# Altium PCB E1706R_Demo_1.PcbDoc
Units mil, origin at the board's own origin, x right, y up, seen from the top; angles counter-clockwise.
Board outline 1170 x 2260 mil, 2 copper layers (Top Layer, Bottom Layer); 11 components, 39 nets, 82 pads, 9 vias.
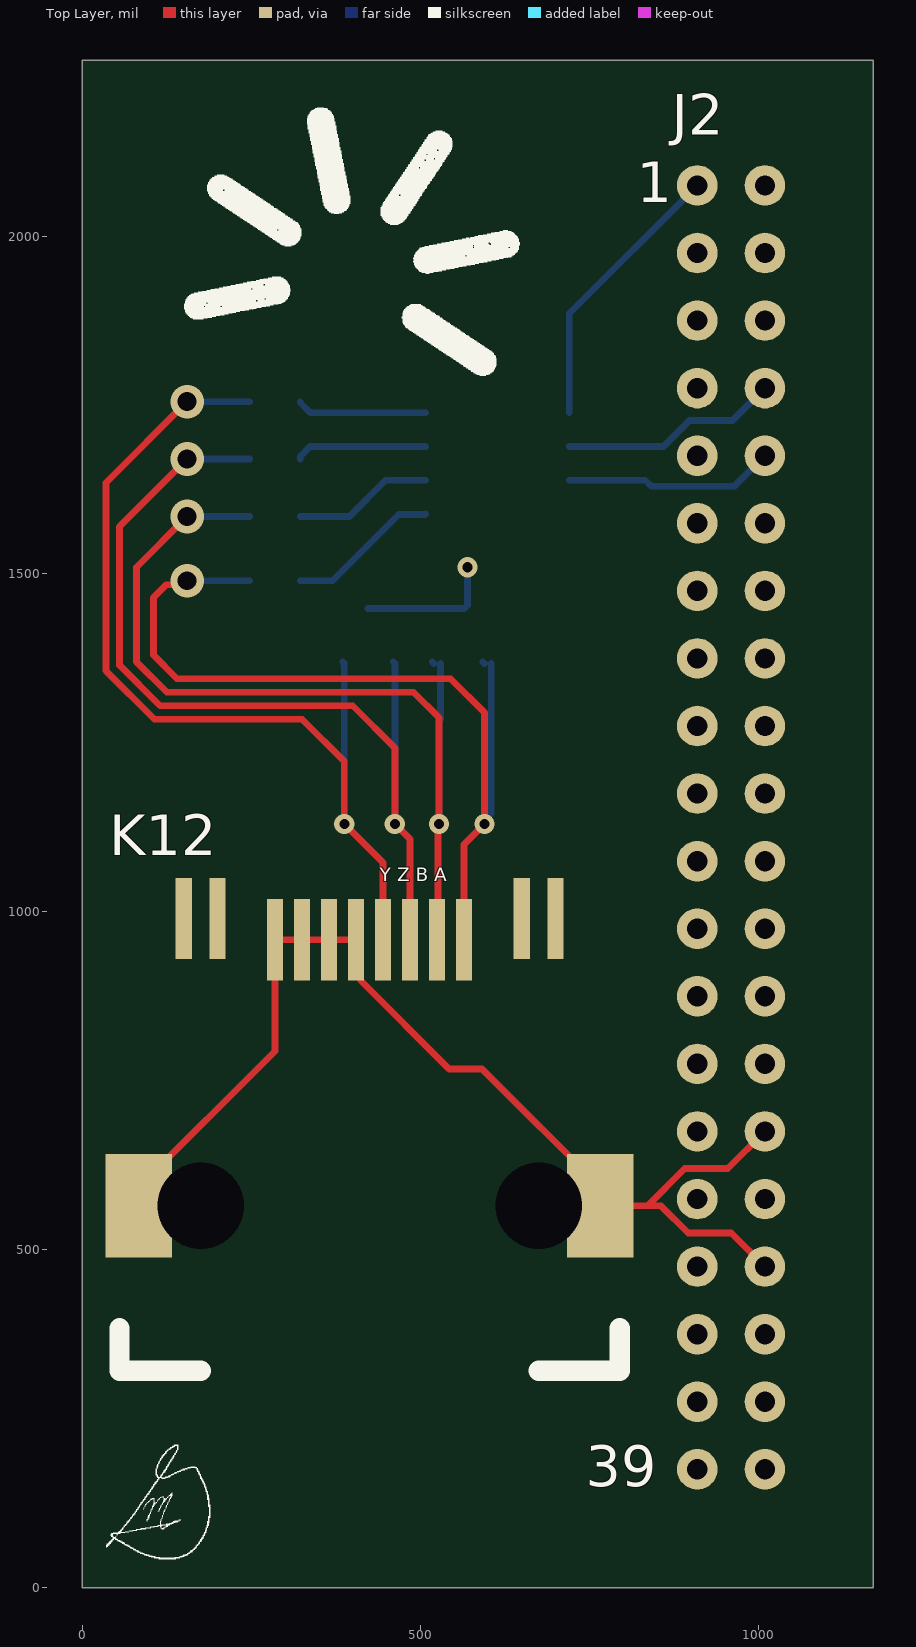
[diagram p0: Top Layer view]
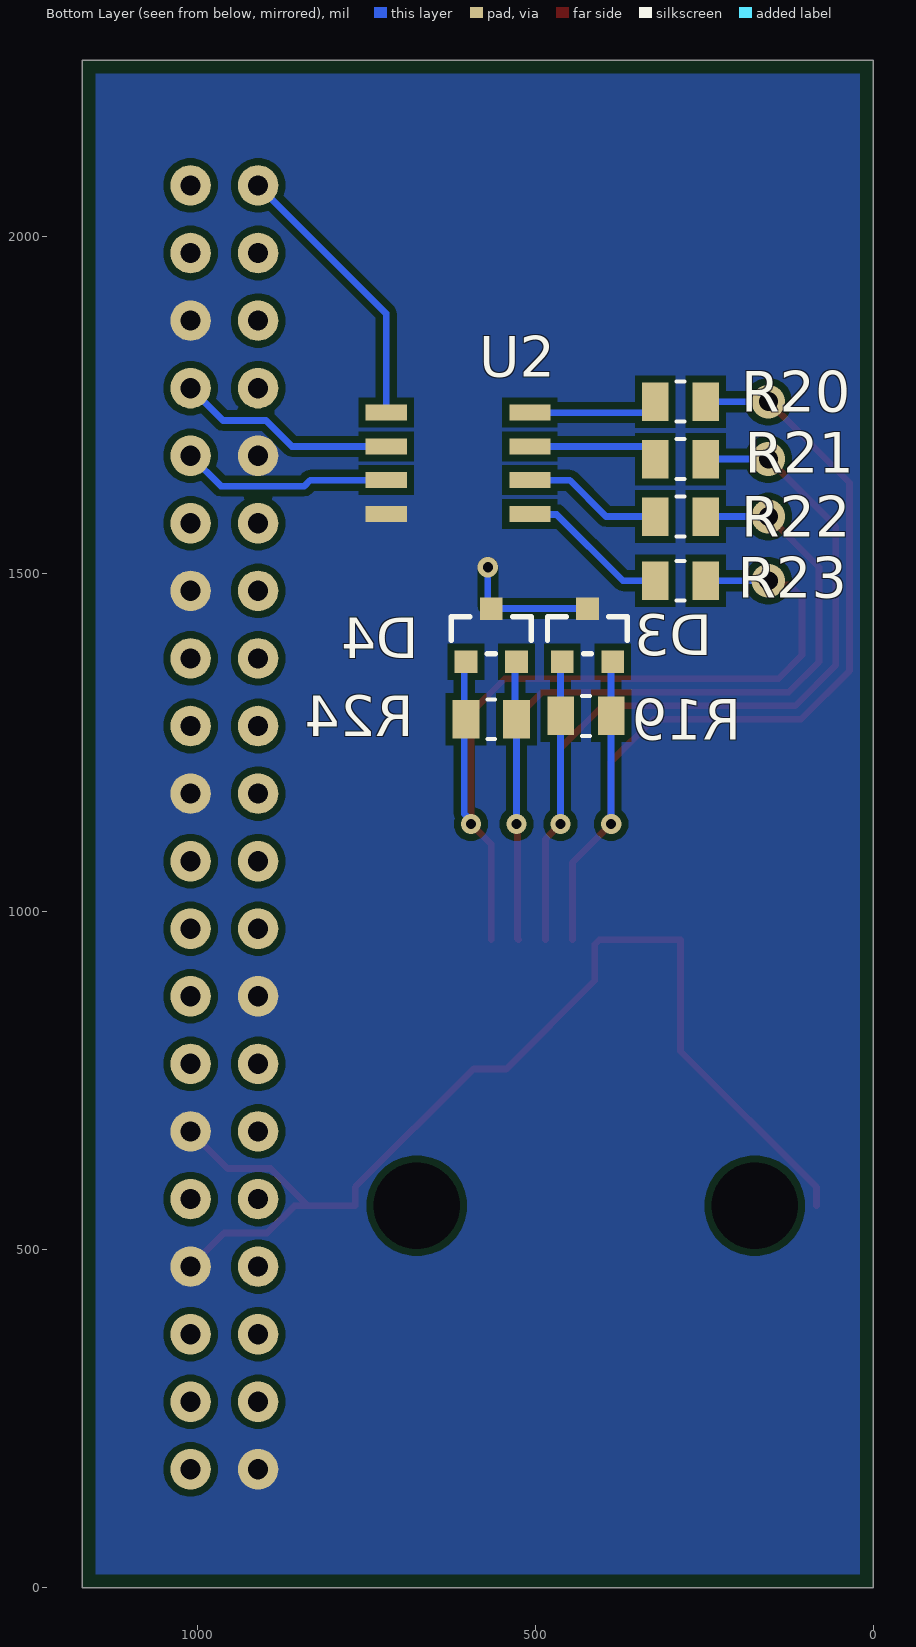
[diagram p1: Bottom Layer view, seen from below]
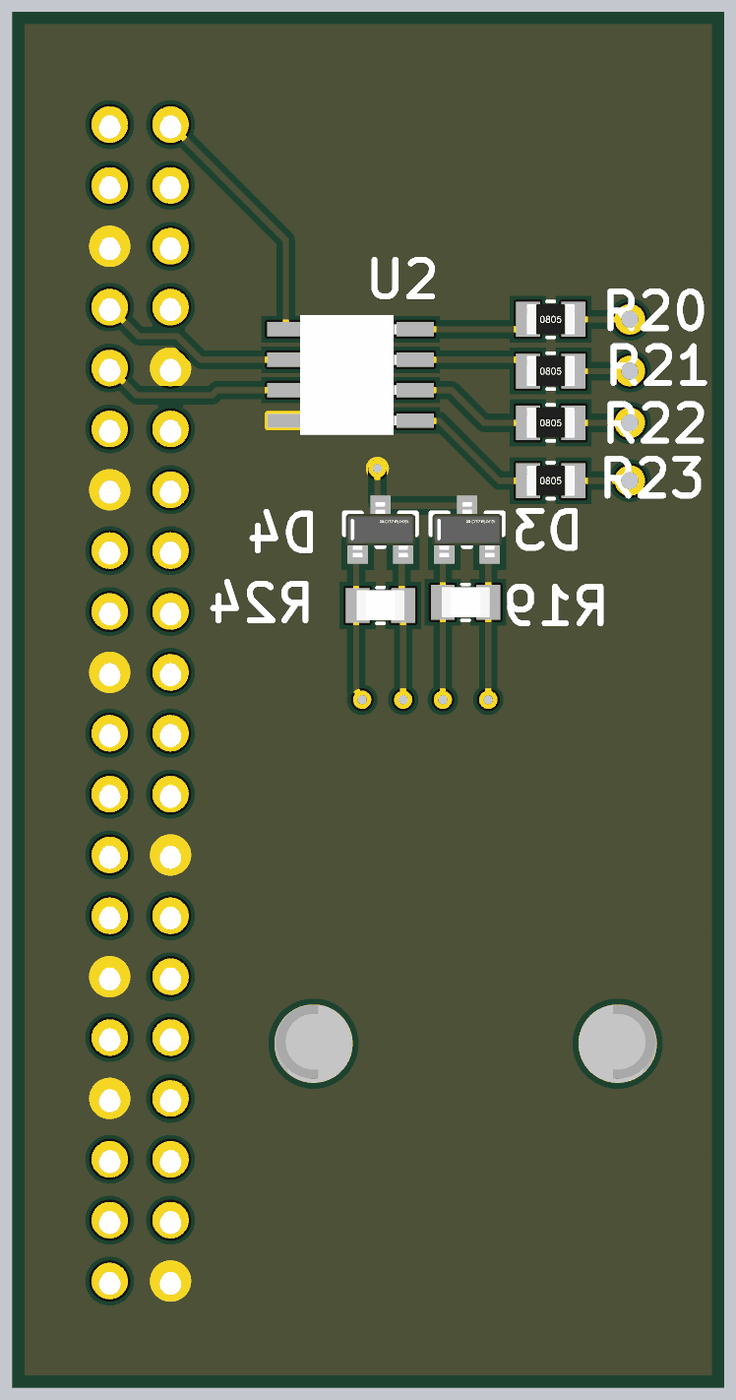
[diagram p2: 3D render of the assembled board from below, using the file's embedded part models]

## Layer stack, top to bottom
Top Solder: solder mask 0.4, Solder Resist, Dk 3.5
Top Layer: signal copper 1.4
Dielectric 1: dielectric 12.6, FR-4, Dk 4.8
Bottom Layer: signal copper 1.4
Bottom Solder: solder mask 0.4, Solder Resist, Dk 3.5

## Board outline
0,0 1170,0 1170,2260 0,2260

## Design rules (kind name [scope] priority, off if disabled: settings)
Clearance [All] p1: gap=10 ignorepadtopadclearanceinfootprint=FALSE except(0: Arc-Hole Track-Hole SMDPad-Hole THPad-Hole Via-Hole Fill-Hole Poly-Hole Region-Hole Text-Hole)
PlaneConnect [All] p1: planeconnectstyle=Direct reliefexpansion=20 reliefentries=4 reliefconductorwidth=10 reliefairgap=10
PolygonConnect [All] p1: connectstyle=Direct reliefconductorwidth=10 reliefentries=4 polygonreliefangle="90 Angle" airgapwidth=10
RoomDefinition E1706D_Schematic [InComponentClass('E1706D_Schematic')] p1: confinementstyle=ConfineIn formatcopy=TRUE lockcomponents=FALSE outline -985,-2080 1015,-2080 1015,-1080 -985,-1080
RoomDefinition E1706R_Schematic_1 [InComponentClass('E1706R_Schematic_1')] p2: confinementstyle=ConfineIn formatcopy=TRUE lockcomponents=FALSE outline 855,115 1905,115 1905,2225 855,2225
RoutingVias [All] p1: holewidth=28 width=50 viastyle="Through Hole" minholewidth=28 minwidth=50 maxholewidth=28 maxwidth=50
SolderMaskExpansion [All] p1: expansion=4 istentingtop=FALSE
Width [All] p1: maxlimit=10 minlimit=10 preferedwidth=10
29 further rules are at their usual default settings.

## Components (designator, comment, footprint, x,y, rotation, side; value= is the part's Value field where it differs from the comment)
D3 "CDSOT23-SM712" FP-SOT23-MFG 422.6,1409.37 r90 bottom value=75pF
D4 "CDSOT23-SM712" FP-SOT23-MFG 565,1409.37 r90 bottom value=75pF
J2 "2223" 2223 910,2075 r0 top
K12 "6339191-5" 6339191-5 284.84,958.7 r0 top
R19 "Res_120_0805" RESC2012N 425,1290 r180 bottom
R20 "Res_10_0805" RESC2012N 285,1755 r180 bottom
R21 "Res_10_0805" RESC2012N 285,1670 r180 bottom
R22 "Res_10_0805" RESC2012N 285,1585 r180 bottom
R23 "Res_10_0805" RESC2012N 285,1490 r180 bottom
R24 "Res_120_0805" RESC2012N 565,1285 r180 bottom
U2 "SN65HVD71DR" SN65HVD71DR 720.43,1738.74 r270 bottom

## Footprints (in the part's own frame and the unit in brackets; to place one, negate y for a bottom-side part, rotate by r counter-clockwise, add the part's x,y. Pads: shape width x height; smd on the part's side, far side on the other; paste and mask are expansions set on the pad)
2223 [mil] "40 PIN 20X2 CONN"
  round 60 hole 30: 1(0,0) 2(100,0) 3(0,-100) 4(100,-100) 5(0,-200) 6(100,-200) 7(0,-300) 8(100,-300) 9(0,-400) 10(100,-400) 11(0,-500) 12(100,-500) 13(0,-600) 14(100,-600) 15(0,-700) 16(100,-700) 17(0,-800) 18(100,-800) 19(0,-900) 20(100,-900) 21(0,-1000) 22(100,-1000) 23(0,-1100) 24(100,-1100) 25(0,-1200) 26(100,-1200) 27(0,-1300) 28(100,-1300) 29(0,-1400) 30(100,-1400) 31(0,-1500) 32(100,-1500) 33(0,-1600) 34(100,-1600) 35(0,-1700) 36(100,-1700) 37(0,-1800) 38(100,-1800) 39(0,-1900) 40(100,-1900)
  body extent -48,-1955 148,45, height 335
6339191-5 [mm]
  rect 2.5x3.9 smd: 0(-5.11,-10) 0(12.23,-10)
  rect 0.61x3.05 smd: 0(-3.425,0.8) 0(-2.155,0.8) 0(9.275,0.8) 0(10.545,0.8) 1(0,0) 2(1.016,0) 3(2.032,0) 4(3.048,0) 5(4.064,0) 6(5.08,0) 7(6.096,0) 8(7.112,0)
  round 1.524 hole 3.25: 0(-2.79,-10) 0(9.91,-10)
  silkscreen extent -5.84,-16.2 12.96,-14.6, body extent -5.84,-16.2 12.96,1.97, height 14.92
FP-SOT23-MFG [mm]
  rect 0.85x0.85 smd paste+0 mask+0: 1(-1,-0.95) 2(-1,0.95) 3(1,0)
  silkscreen extent -0.7,-1.5 0.7,1.5, body extent -1.15,-1.45 1.15,1.45, height 1.17
RESC2012N [mm] "Chip Resistor, Body 2.0x1.3mm, IPC Med Density"
  rect 1x1.45 smd: 1(-0.95,0) 2(0.95,0)
  silkscreen extent -0.15,-0.75 0.15,0.75, body extent -1,-0.63 1,0.63, height 0.59
SN65HVD71DR [mm] "SOIC-8"
  rect 0.6x1.55 smd: 1(0,0) 2(1.27,0) 3(2.54,0) 4(3.81,0) 5(3.81,5.4) 6(2.54,5.4) 7(1.27,5.4) 8(0,5.4)
  body extent -0.59,-0.41 4.41,5.59, height 1.75

## Part data
D3 D4: library part CMP-2000-05081-2, "TVS DIODE 7V/12V 14V/26V SOT23-3", Breakdown Voltage=7.5V, Capacitance=75pF, Case/Package=SOT-23, Clamping Voltage=26V, Leakage Current=20uA, Manufacturer="Bourns Inc.", Max Breakdown Voltage=13.3V, Max Operating Temperature=150°C, Max Power Dissipation=600W, Max Surge Current=30A, Min Operating Temperature=-55°C, Package=SOT23, Package Quantity=1, Peak Pulse Current=17A, Peak Pulse Power=400W, Power Line Protection=No, Resistor Type=Zener, Reverse Standoff Voltage=12V, Supplier Part Number 1=CDSOT23-SM712CT-ND, Temperature="-55°C to +150°C", Temperature Range High=+150°C, Test Current=1mA, Automotive=No, Category=Diode, ComponentLink1Description=https://datasheet.ciiva.com/1281/1670933-1281331.pdf?src-supplier=Farnell, ComponentLink1URL=https://datasheet.ciiva.com/1281/1670933-1281331.pdf?src-supplier=Farnell, ComponentLink2Description=Datasheet, ComponentLink2URL=https://www.bourns.com/docs/Product-Datasheets/CDSOT23-SM712.pdf, ComponentLink3Description=https://datasheet.ciiva.com/4510/cdsot23-sm712-25932-4510261.pdf?src-supplier=Mouser, ComponentLink3URL=https://datasheet.ciiva.com/4510/cdsot23-sm712-25932-4510261.pdf?src-supplier=Mouser, ComponentLink4Description=https://datasheet.ciiva.com/11193/cdsot23-sm712-11193846.pdf?src-supplier=Avnet, ComponentLink4URL=https://datasheet.ciiva.com/11193/cdsot23-sm712-11193846.pdf?src-supplier=Avnet, ComponentLink5Description=https://datasheet.ciiva.com/16582/cdsot23-sm712-16582189.pdf?src-supplier=Avnet+Europe, ComponentLink5URL=https://datasheet.ciiva.com/16582/cdsot23-sm712-16582189.pdf?src-supplier=Avnet+Europe, ComponentLink6Description=https://datasheet.ciiva.com/337/cdsot23-sm712-337451.pdf?src-supplier=Digi-Key, ComponentLink6URL=https://datasheet.ciiva.com/337/cdsot23-sm712-337451.pdf?src-supplier=Digi-Key, ComponentLink7Description=https://datasheet.ciiva.com/337/cdsot23-sm712-337452.pdf?src-supplier=Digi-Key, ComponentLink7URL=https://datasheet.ciiva.com/337/cdsot23-sm712-337452.pdf?src-supplier=Digi-Key, ComponentLink8Description=https://datasheet.ciiva.com/26828/getdatasheetpartid-418501-26828522.pdf?src-supplier=Verical, ComponentLink8URL=https://datasheet.ciiva.com/26828/getdatasheetpartid-418501-26828522.pdf?src-supplier=Verical, ComponentLink9Description=https://datasheet.ciiva.com/22696/1670933-22696779.pdf?src-supplier=Element14, ComponentLink9URL=https://datasheet.ciiva.com/22696/1670933-22696779.pdf?src-supplier=Element14, Contact Plating=Tin, Depth=1.4mm, Device Class L1="Circuit Protection", Device Class L2="TVS Diodes", Device Class L3=unset, Digikey Description="TVS DIODE 7V/12V 14V/26V SOT23-3", Diode Type=ZENER, Direction=Bidirectional, Element Configuration=Dual, ESD Protection=Yes, Height=1.17mm, Ipc Land Pattern Name=SOT95P229X103-3, Lead Free=Yes, Length=3.04mm, Manufacturer Part Number=CDSOT23-SM712, Max Reverse Leakage Current=20uA, Min Breakdown Voltage=13.3V, Mount="Surface Mount", Mouser Description="Transient Voltage Suppressor, TVS, CDSOT23 Series, Unidirectional, 12 V, SOT-23, 3, 13.3 V", Number of Bidirectional Channels=2, Number of Channels=2, Number of Elements=2, Number of Pins=3, Octopart=https://octopart.com/cdsot23-sm712-bourns-7576327, Packaging="Tape and Reel", Polarity=Bidirectional,Unidirectional, Power Dissipation=400W, Pricing 1="1=1.63000, 10=1.46000, 100=1.13850, 500=0.94050, 1000=0.74250 (USD)", Radiation Hardening=No, REACH SVHC="No SVHC", Reverse Breakdown Voltage=13.3V, RoHS=TRUE, RoHS Compliant=Yes, Series=-, Standoff Height=0.05mm, Stock 1=37537, Supplier 1=Digi-Key, Temperature Range Low=-55°C, Termination=SMD/SMT, Width=0.055inch, Working Voltage=12V
J2: "40 PIN 20X2 CONN"
R19 R24: "RES 120 OHM 1/8W 1% 0805"
R20 R21 R22 R23: "RES 10 OHM 1/8W 1% 0805", Manufacturer="Vishay Dale", Manufacturer P/N=CRCW080510R0FKEA, Package / Case="0805 (2012 Metric)", Power (Watts)="0.125W, 1/8W", Resistance (Ohms)=10, Supplier Part Number 1=541-10.0CCT-ND, Temperature Coefficient=±100ppm/°C, Tolerance=±1%, ComponentLink1Description=Datasheet, ComponentLink1URL=http://www.vishay.com/doc?20035, Composition="Thick Film", Features="Automotive AEC-Q200 Qualified", RoHS="RoHS Compliant", Supplier 1=Digi-Key, Supplier 2=Digi-Key, Supplier Part Number 2=541-10.0CTR-ND
U2: "Single Transmitter/Receiver RS-485 8-Pin SOIC T/R", Case/Package=SOIC, Manufacturer="Texas Instruments", Max Operating Temperature=125°C, Min Operating Temperature=-40°C, Operating Supply Voltage=3.3V, Supplier Part Number 1=296-40519-1-ND, Category="RS-232 / RS-422 / RS-485 Interface ICs", ComponentLink1Description=https://datasheet.ciiva.com/48475/sn65hvd70-48475464.pdf?src-supplier=Avnet, ComponentLink1URL=https://datasheet.ciiva.com/48475/sn65hvd70-48475464.pdf?src-supplier=Avnet, Data Rate=400Kbps, Lead Free="Lead Free", Logic Function=Receiver, Manufacturer Part Number=SN65HVD71DR, Mount="Surface Mount", Number of Pins=8, Number of Transmitters=1, Packaging="Tape and Reel", Pricing 1="1=3.41000, 10=3.06300, 25=2.89520, 100=2.50930, 250=2.38064, 500=2.13616, 1000=2.12450 (USD)", Receiver Hysteresis=70mV, RoHS=Yes, RoHS Compliant=Yes, Simplex/Duplex="Full Duplex", Stock 1=1611, Supplier 1=Digi-Key

## Via types
v1: diameter 30, hole 15, Top Layer to Bottom Layer, 5 vias
v2: diameter 50, hole 28, Top Layer to Bottom Layer, 4 vias

## Nets (pads, with @x,y where several pads share a name; then routed paths per layer and width w, separated by ;. In a path a pad name is that pad's centre, name@x,y a point inside that pad or via, vN(x,y) a via of type N, cw(c..) or ccw(c..) an arc to the next point about the centre after c; other vN are vias at no path point)
3V3: J2.1 U2.1 | length 414.8
  Bottom Layer w10: U2.1 720.43,1885.43 J2.1
5V: 
A: D4.2 K12.8 R23.2 R24.1 | length 1357.2
  Top Layer w10: v2(155,1490) 149.22,1484.22 124.22,1484.22 105,1465 105,1380 140,1345 545,1345 595,1295 v1(595,1130) 564.84,1099.84 K12.8
  Bottom Layer w10: v2(155,1490) R23.2 ; D4.2@592.4,1370 D4.2@595,1367.4 ; v1(595,1130) 595,1135.41 605,1145.41 D4.2@605,1367.4
B: D4.1 K12.7 R22.2 R24.2 | length 1392.3
  Top Layer w10: v2(155,1585) 80,1510 80,1370 125,1325 490,1325 527.6,1287.4 v1(527.6,1130) 526.22,1128.62 526.22,960.08 K12.7
  Bottom Layer w10: v2(155,1585) R22.2 ; D4.1@517.6,1370 D4.1@520,1367.6 ; v1(527.6,1130) 527.6,1282.6 530,1285 D4.1@530,1367.6
D2: 
D3: 
D4: 
D5: 
D6: 
D7: 
D8: 
D9: 
D10: 
D11: 
D12: 
D13: 
GND: D3.3 D4.3 J2.6 J2.9 J2.14 J2.20 J2.25 J2.30 J2.34 J2.39 K12.0@83.66,565 K12.0@766.34,565 K12.1 K12.2 K12.3 K12.4 U2.4 | length 1874.8
  Top Layer w10: K12.0@83.66,565 83.66,592.56 284.84,793.74 K12.1 K12.2 K12.3 K12.4 411.85,951.69 411.85,898.43 542.68,767.6 591.3,767.6 766.34,592.56 766.34,565 836.36,565 ; J2.34 960.22,524.78 896.58,524.78 856.36,565 836.36,565 ; J2.30 955,620 891.36,620 836.36,565
  Bottom Layer w10: D3.3 D4.3 570,1453.74 v1(570,1510)
NetD5_1: 
NetD6_1: 
NetD7_1: 
NetD8_1: 
NetD9_1: 
NetD10_1: 
NetD11_1: 
NetD12_1: 
NetD13_1: 
NetD14_1: 
NetR14_1: 
NetR15_1: 
NetR16_1: 
NetR17_1: 
NetR20_1: R20.1 U2.8 | length 193.1
  Bottom Layer w10: R20.1 322.4,1753.43 337.09,1738.74 U2.8
NetR21_1: R21.1 U2.7 | length 195.6
  Bottom Layer w10: R21.1 322.4,1674.05 337.09,1688.74 U2.7
NetR22_1: R22.1 U2.6 | length 207.7
  Bottom Layer w10: R22.1 395,1585 448.74,1638.74 U2.6
NetR23_1: R23.1 U2.5 | length 226.3
  Bottom Layer w10: R23.1 370,1490 468.18,1588.18 507.28,1588.18 U2.5
Rx: J2.8 U2.2 | length 325.3
  Bottom Layer w10: U2.2 860.1,1688.74 898.45,1727.09 962.09,1727.09 J2.8
Tx: J2.10 U2.3 | length 311.8
  Bottom Layer w10: U2.3 832.92,1638.74 841.66,1630 965,1630 J2.10
Y: D3.1 K12.5 R19.2 R20.2 | length 1477.2
  Top Layer w10: v2(155,1755) 35,1635 35,1356.72 106.72,1285 325,1285 387.6,1222.4 v1(387.6,1130) 444.84,1072.76 K12.5
  Bottom Layer w10: v2(155,1755) R20.2 ; D3.1 387.6,1367.6 R19.2 v1(387.6,1130)
Z: D3.2 K12.6 R19.1 R21.2 | length 1431.3
  Top Layer w10: v2(155,1670) 55,1570 55,1365 115,1305 400,1305 462.4,1242.6 v1(462.4,1130) 484.84,1107.56 K12.6
  Bottom Layer w10: v2(155,1670) R21.2 ; D3.2 462.4,1367.6 R19.1 v1(462.4,1130)
pads on no net: J2.2 J2.3 J2.4 J2.5 J2.7 J2.11 J2.12 J2.13 J2.15 J2.16 J2.17 J2.18 J2.19 J2.21 J2.22 J2.23 J2.24 J2.26 J2.27 J2.28 J2.29 J2.31 J2.32 J2.33 J2.35 J2.36 J2.37 J2.38 J2.40 K12.0@150,990.2 K12.0@175,565 K12.0@200,990.2 K12.0@650,990.2 K12.0@675,565 K12.0@700,990.2

## Polygon pours and split planes (outlines as drawn)
GND on Bottom Layer "GND_L02_P000" (solid, pour order 0): 20,20 1150,20 1150,2240 20,2240

## Silkscreen, mask and mechanical layers (free items; w line width, h text height)
Top Overlay:
  drawing of 7 lines, arcs and shapes, not listed
  text "1" at 820,2050 h60
  text "Y Z B A" at 440,1045 h20
  text "39" at 745,150 h60
Mechanical 1:
  the board outline again, w10